# Altium PCB NCD_PCB.PcbDoc
Units mm, origin at the board's own origin, x right, y up, seen from the top; angles counter-clockwise.
Board outline 17 x 10 mm, 2 copper layers (Top Layer, Bottom Layer); 13 components, 2 nets, 26 pads, 0 vias.
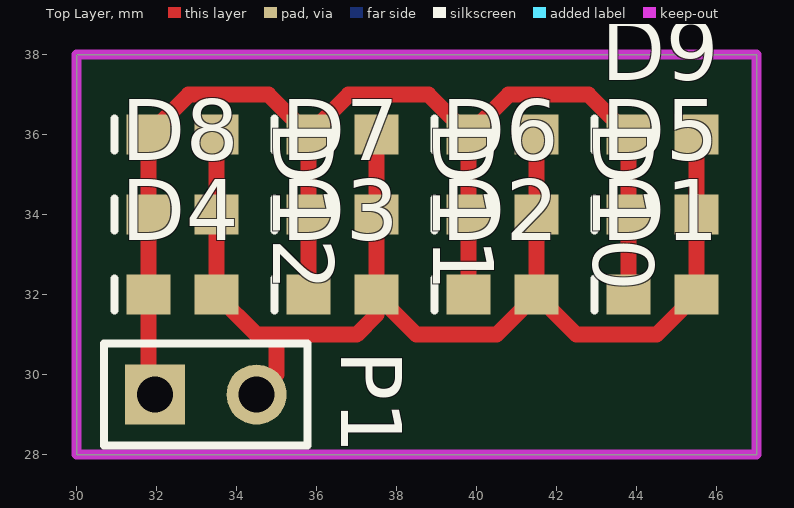
[diagram p0: Top Layer view]
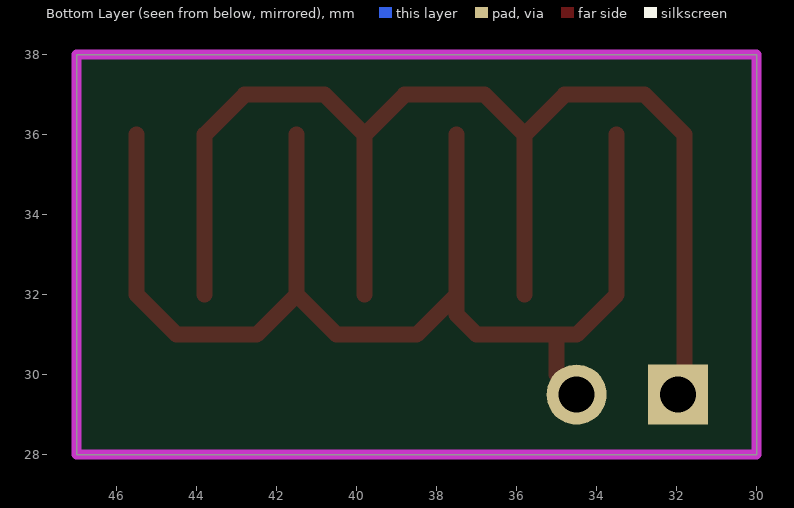
[diagram p1: Bottom Layer view, seen from below]

## Layer stack, top to bottom
Top Solder: solder mask 0.0102, Solder Resist, Dk 3.5
Top Layer: signal copper 0.0356
Dielectric 1: dielectric 0.32, FR-4, Dk 4.8
Bottom Layer: signal copper 0.0356
Bottom Solder: solder mask 0.0102, Solder Resist, Dk 3.5

## Board outline
30,28 30,38 47,38 47,28

## Design rules (kind name [scope] priority, off if disabled: settings)
Clearance [All] p1: gap=0.254 ignorepadtopadclearanceinfootprint=FALSE except(0: Arc-Hole Track-Hole SMDPad-Hole THPad-Hole Via-Hole Fill-Hole Poly-Hole Region-Hole Text-Hole)
PolygonConnect [All] p1: connectstyle=Relief reliefconductorwidth=0.254 reliefentries=4 polygonreliefangle="90 Angle" airgapwidth=0.254
RoomDefinition NCD_SHEET [InComponentClass('NCD_SHEET')] p1: confinementstyle=ConfineIn formatcopy=TRUE lockcomponents=FALSE outline 30.15,27.5 46.65,27.5 46.65,37.5 30.15,37.5
RoutingVias [All] p1: holewidth=0.711 width=1.27 viastyle="Through Hole" minholewidth=0.711 minwidth=1.27 maxholewidth=0.711 maxwidth=1.27
SolderMaskExpansion [All] p1: expansion=0.102
Width [All] p1: maxlimit=0.5 minlimit=0.254 preferedwidth=0.254
30 further rules are at their usual default settings.

## Components (designator, comment, footprint, x,y, rotation, side; value= is the part's Value field where it differs from the comment)
D1 "LED1" 0603 44.65,32 r0 top
D2 "LED1" 0603 40.65,32 r0 top
D3 "LED1" 0603 36.65,32 r0 top
D4 "LED1" 0603 32.65,32 r0 top
D5 "LED1" 0603 44.65,34 r0 top
D6 "LED1" 0603 40.65,34 r0 top
D7 "LED1" 0603 36.65,34 r0 top
D8 "LED1" 0603 32.65,34 r0 top
D9 "LED1" 0603 44.65,36 r0 top
D10 "LED1" 0603 40.65,36 r0 top
D11 "LED1" 0603 36.65,36 r0 top
D12 "LED1" 0603 32.65,36 r0 top
P1 "Header 2" HDR1X2 31.96,29.5 r0 top

## Footprints (in the part's own frame and the unit in brackets; to place one, negate y for a bottom-side part, rotate by r counter-clockwise, add the part's x,y. Pads: shape width x height; smd on the part's side, far side on the other; paste and mask are expansions set on the pad)
0603 [mm] "Chip Capacitor; Body 1.6 x 0.8 mm (LxW typ)"
  rect 1.1x1 smd: 1(-0.85,0) 2(0.85,0)
  silkscreen extent -1.7,-0.4 -1.7,0.4
HDR1X2 [mm] "Connector; Header; 2 Position"
  rect 1.5x1.5 hole 0.9: 1(0,0)
  round 1.5 hole 0.9: 2(2.54,0)
  silkscreen extent -1.27,-1.27 3.81,1.27

## Part data
D1 D2 D3 D4 D5 D6 D7 D8 D9 D10 D11 D12: "Typical RED GaAs LED", LatestRevisionDate=08-Jul-2005, LatestRevisionNote="Mech Layer 1 removed.", PackageDescription="LED; 2 Leads", PackageReference=LED-1, Published=8-Jun-2000, Publisher="Altium Limited"
P1: "Header, 2-Pin", LatestRevisionDate=17-Jul-2002, LatestRevisionNote="Re-released for DXP Platform.", Publisher="Altium Limited"

## Nets (pads, with @x,y where several pads share a name; then routed paths per layer and width w, separated by ;. In a path a pad name is that pad's centre, name@x,y a point inside that pad or via, vN(x,y) a via of type N, cw(c..) or ccw(c..) an arc to the next point about the centre after c; other vN are vias at no path point)
GND: D1.2 D2.2 D3.2 D4.2 D5.2 D6.2 D7.2 D8.2 D9.2 D10.2 D11.2 D12.2 P1.2 | length 32.5
  Top Layer w0.4: D12.2 D8.2 D4.2 34.5,31 35,31 ; P1.2 35,30 35,31 ; D11.2 D7.2 D3.2 ; D10.2 D6.2 D2.2 ; D9.2 D5.2 D1.2 44.5,31 42.5,31 D2.2 ; 35,31 37,31 37.5,31.5 D3.2 ; D3.2 38.5,31 40.5,31 D2.2
VCC: D1.1 D2.1 D3.1 D4.1 D5.1 D6.1 D7.1 D8.1 D9.1 D10.1 D11.1 D12.1 P1.1 | length 33.1
  Top Layer w0.254: P1.1@31.8,29.66 P1.1
  Top Layer w0.4: P1.1@31.8,29.66 D4.1 D8.1 D12.1 32.8,37 34.8,37 D11.1 ; D3.1 D7.1 D11.1 ; D2.1 D6.1 D10.1 ; D1.1 D5.1 D9.1 42.8,37 40.8,37 D10.1 ; D11.1 36.8,37 38.8,37 D10.1

## Keep-outs
Keep-Out Layer:
  the board outline again, w0.254